# Altium PCB Slave_V2.PcbDoc
Units mil, origin at the board's own origin, x right, y up, seen from the top; angles counter-clockwise.
Board outline 2545 x 2570 mil, 2 copper layers (Top Layer, Bottom Layer); 78 components, 53 nets, 249 pads, 85 vias.
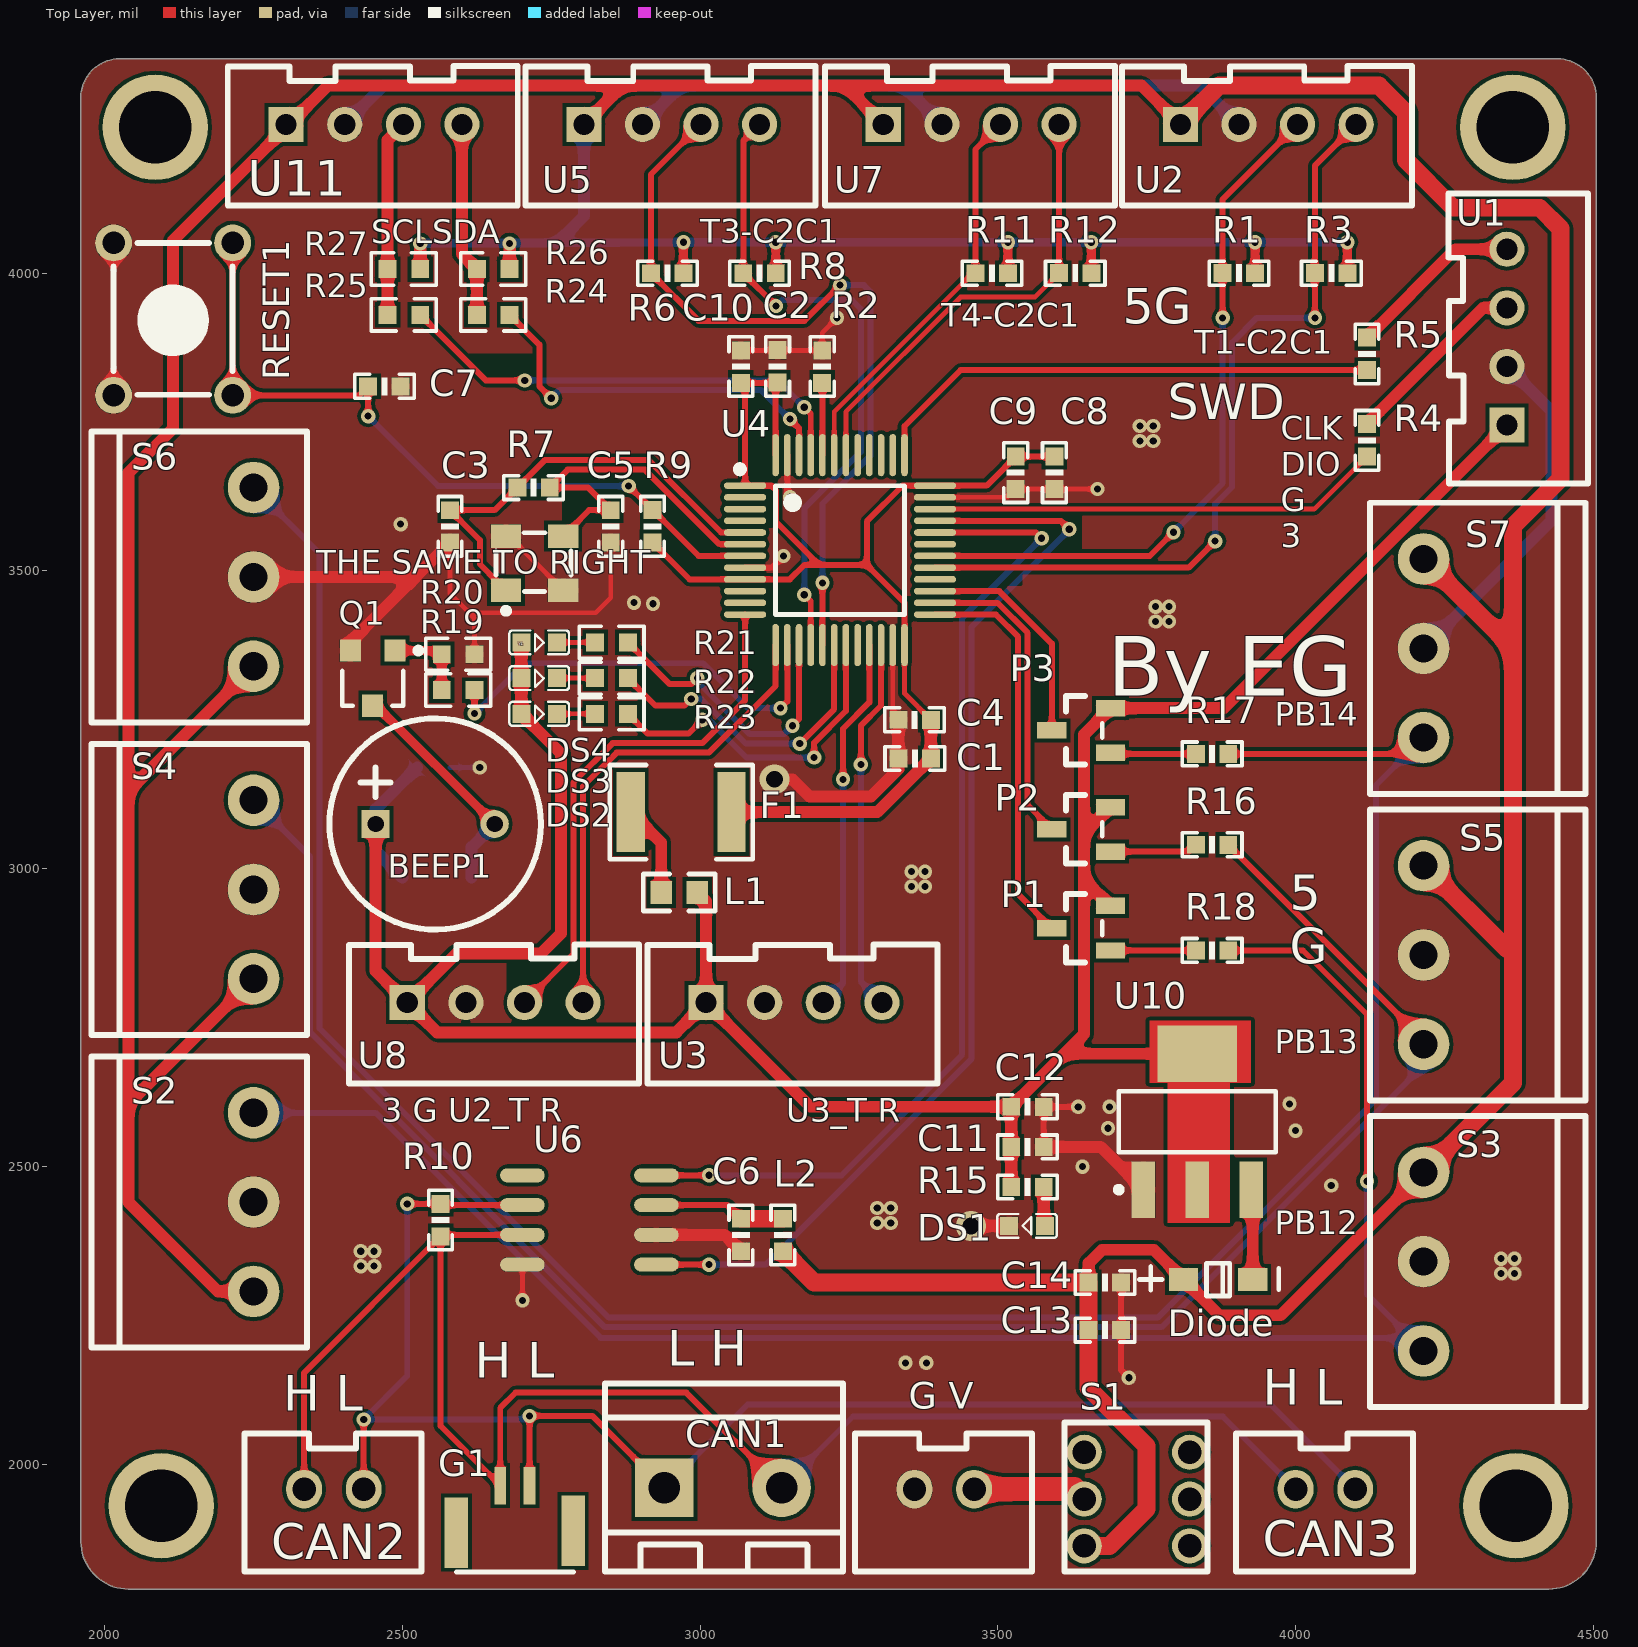
[diagram p0: Top Layer view]
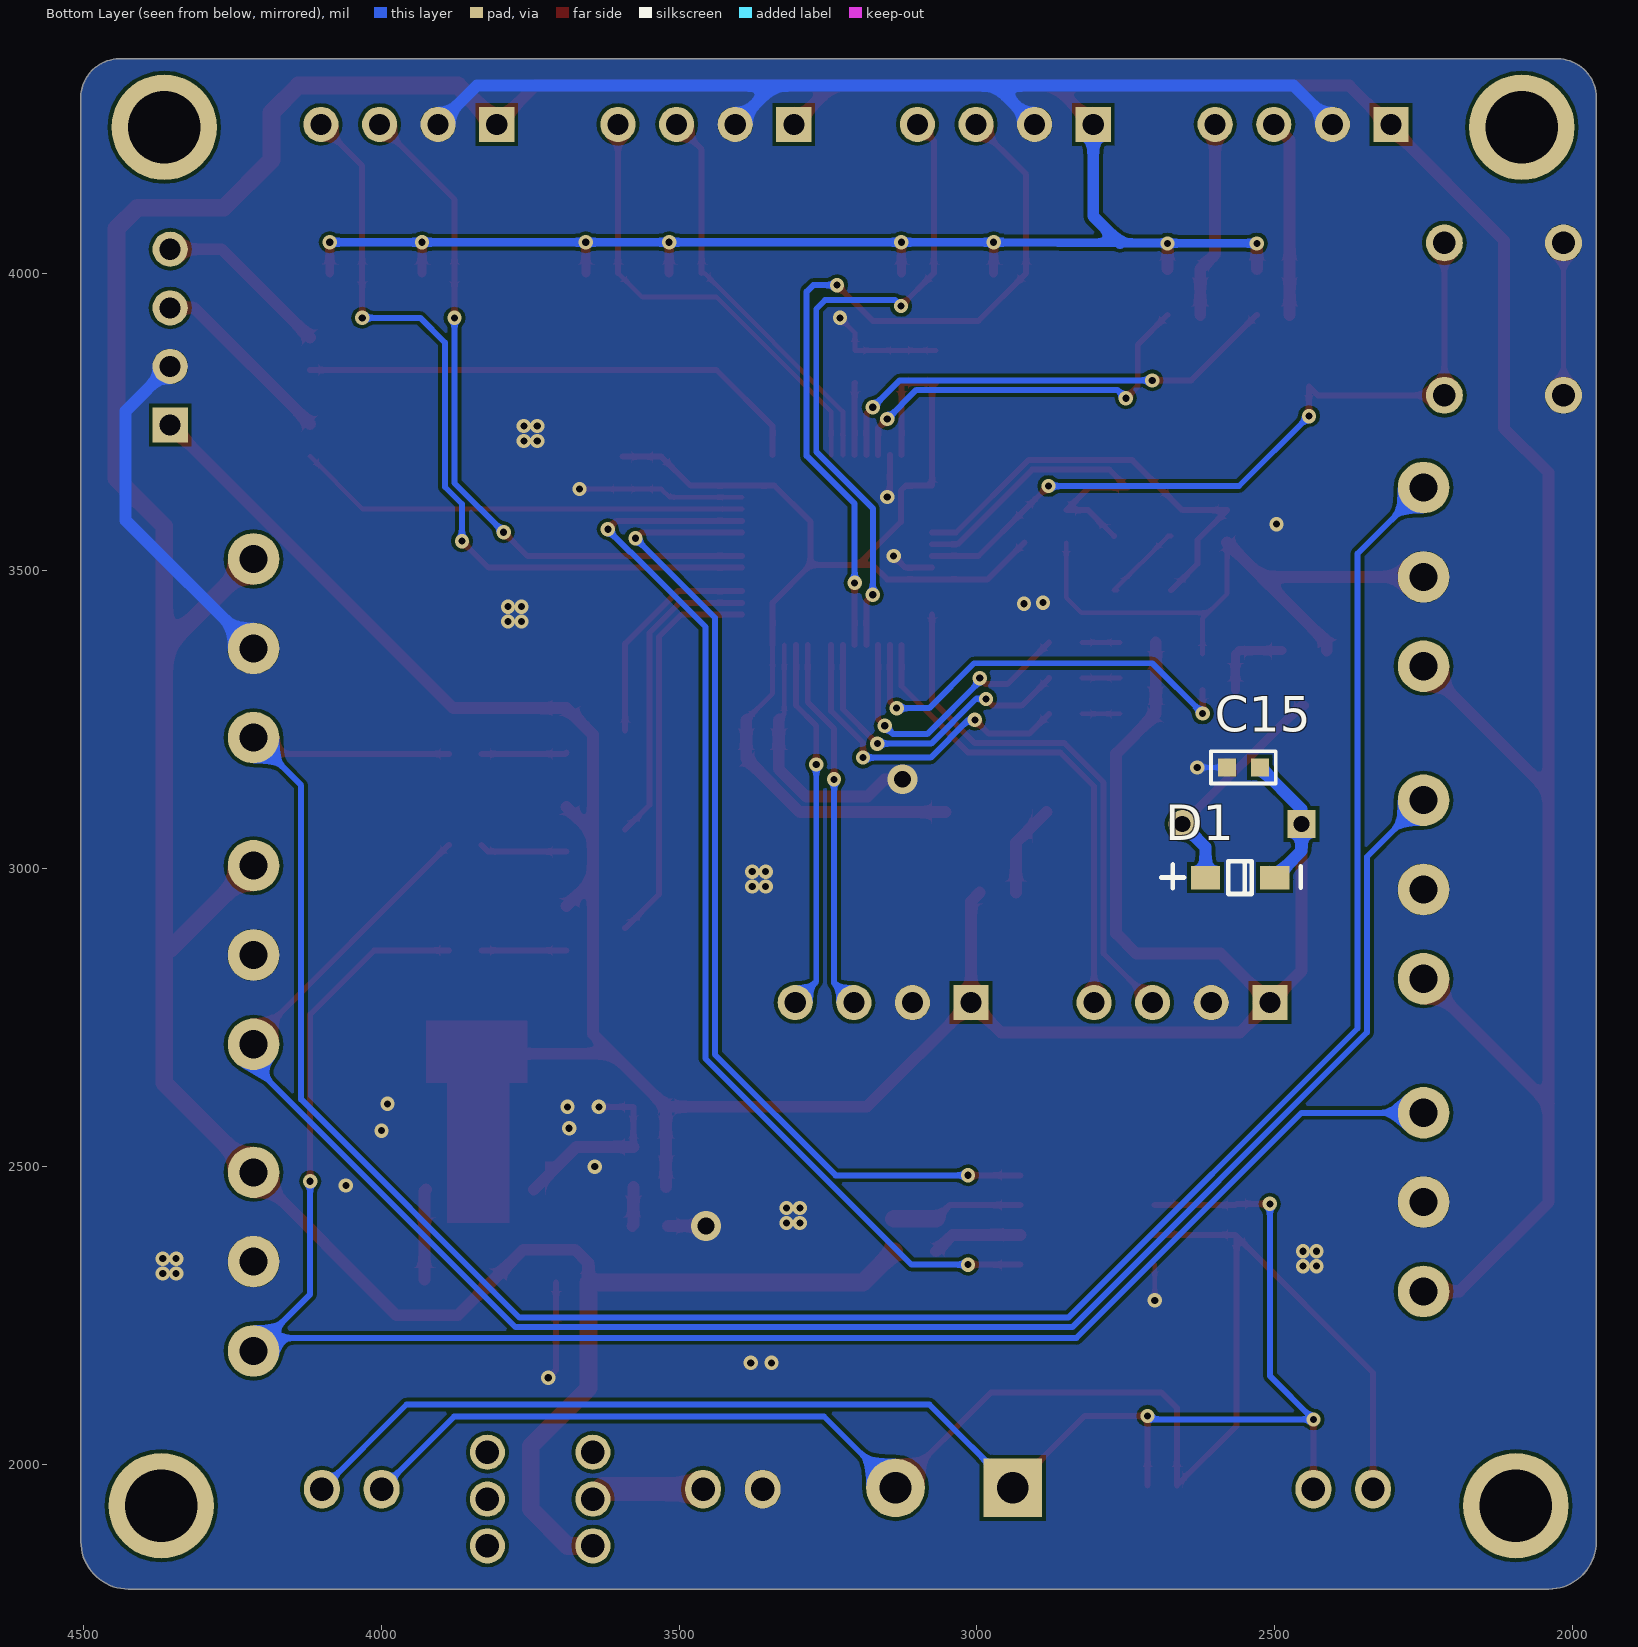
[diagram p1: Bottom Layer view, seen from below]

## Layer stack, top to bottom
Top Solder: solder mask 0.4, Solder Resist, Dk 3.5
Top Layer: signal copper 1.4
Dielectric 1: dielectric 12.6, FR-4, Dk 4.8
Bottom Layer: signal copper 1.4
Bottom Solder: solder mask 0.4, Solder Resist, Dk 3.5

## Board outline
1960,1870 1960,4295 cw(c2025,4295) 2025,4360 4440,4360 cw(c4440,4295) 4505,4295 4505,1870 cw(c4425,1870) 4425,1790 2040,1790 cw(c2040,1870)

## Design rules (kind name [scope] priority, off if disabled: settings)
Clearance [All] p1: gap=6 ignorepadtopadclearanceinfootprint=FALSE
PolygonConnect [IsVia] p1: connectstyle=Direct reliefconductorwidth=10 reliefentries=4 polygonreliefangle="90 Angle" airgapwidth=10
RoutingVias [All] p1: holewidth=28 width=50 viastyle="Through Hole" minholewidth=28 minwidth=50 maxholewidth=28 maxwidth=50
SolderMaskExpansion [All] p1: expansion=4
Width [All] p1: maxlimit=100 minlimit=8 preferedwidth=10
30 further rules are at their usual default settings.

## Classes and differential pairs
net class "New Class": GND

## Components (designator, comment, footprint, x,y, rotation, side; value= is the part's Value field where it differs from the comment)
BEEP1 "BEEP" BELL-5 2455,3075 r0 top locked
C1 "0.1uf" 0603P 3360.5,3185 r180 top
C2 "0.1uf" 0603P 3130,3843.43 r90 top
C3 "22PF" 0603P 2580,3575 r270 top
C4 "0.1uf" 0603P 3360,3250 r0 top
C5 "22" 0603P 2850,3575 r270 top
C6 "104" 0603P 3068.63,2385 r270 top
C7 "0.1uf" 0603P 2470,3809.94 r180 top
C8 "1uf" 0603P 3595.06,3665 r270 top
C9 "0.1uf" 0603P 3530,3665 r270 top
C10 "0.1uf" 0603P 3068.56,3843.43 r270 top
C11 "104" 0603P 3550,2532.65 r180 top
C12 "104" 0603P 3550,2600 r180 top
C13 "106" 0603P 3680,2225 r180 top
C14 "104" 0603P 3680,2305 r180 top
C15 "106" 0603C 2525,3170 r0 bottom
CAN1 "CAN" HEAD2L-0.8 2940,1960 r0 top
CAN2 "CAN" XH2.54-2 2435,1958 r0 top
CAN3 "CAN" XH2.54-2 4100.1,1958 r0 top
D1 "RB161MM-20TR" LC-SOD-123F 2558.15,2985 r0 bottom
Diode "D1" LC-SOD-123F 3870,2310 r180 top
DS1 "LED1" 0603_LED 3550,2400 r180 top
DS2 "LED0" 0603_LED 2728.73,3380 r0 top
DS3 "LED1" 0603_LED 2728.73,3320 r0 top
DS4 "LED2" 0603_LED 2728.73,3260 r0 top
F1 "0.3A 60VPTC FUSE" LC-1812_R 2968.07,3095 r0 top
G1 "CAN-GH1.25" GH1.25_1*2_lishi 2787.57,1818.94 r180 top
"G V" "XH2.54" XH2.54-2 3460.1,1958 r0 top (schematic designator POWER-2.54)
L1 "220R,2.0A,0.05DCR" L_0603 2965,2960 r0 top
L2 "220R,2.0A,0.05DCR" 0603P 3139.1,2385 r270 top
P1 "BSS84-PMOS" LC-SOT-23(SOT-23-3) 3640,2900 r0 top
P2 "BSS84-PMOS" LC-SOT-23(SOT-23-3) 3640,3066.07 r0 top
P3 "BSS84-PMOS" LC-SOT-23(SOT-23-3) 3640,3232.14 r0 top
Q1 "S8050" SOT-23R 2450,3325 r180 top
R1 "3.3K" 0603P 3905,4000.06 r180 top
R2 "10K" 0603P 3205,3843.43 r270 top
R3 "3.3K" 0603P 4060,4000.06 r180 top
R4 "100R" 0603P 4120,3719.45 r90 top
R5 "100R" 0603P 4120,3864.45 r90 top
R6 "3.3K" 0603P 2945,4000 r180 top
R7 "1M" 0603P 2720,3640 r0 top
R8 "3.3K" 0603P 3100,4000 r180 top
R9 "10K" 0603P 2920,3575 r90 top
R10 "120R" 0603P 2564.1,2410 r270 top
R11 "3.3K" 0603P 3490,4000 r180 top
R12 "3.3K" 0603P 3630,4000.06 r180 top
R15 "470R" 0603P 3550,2465.29 r180 top
R16 "10K" 0603P 3860,3040 r180 top
R17 "10K" 0603P 3860,3192.6 r180 top
R18 "10K" 0603P 3860,2862.6 r180 top
R19 "1K" 0603R 2621.1,3300 r180 top
R20 "10K" 0603R 2566.1,3360 r0 top
R21 "470R" 0603R 2823.73,3380 r0 top
R22 "470R" 0603R 2823.73,3320 r0 top
R23 "470R" 0603R 2823.73,3260 r0 top
R24 "0603_100R" 0603R 2680,3930 r180 top
R25 "0603_100R" 0603R 2530,3930 r180 top
R26 "2.7K" 0603R 2625,4007.06 r0 top
R27 "2.7K" 0603R 2475,4007.06 r0 top
RESET1 "KEY_M" KEY_M 2215,4050.91 r270 top
S1 "自锁开关" 自锁开关5.8*5.8 3822.17,2020 r270 top
S2 "3.81" KF2EDG-3.81-3P-弯针 2250,2290 r90 top
S3 "3.81" KF2EDG-3.81-3P-弯针 4215,2490 r270 top
S4 "3.81" KF2EDG-3.81-3P-弯针 2250,2815 r90 top
S5 "3.81" KF2EDG-3.81-3P-弯针 4215,3005 r270 top
S6 "3.81" KF2EDG-3.81-3P-弯针 2250,3340 r90 top
S7 "3.81" KF2EDG-3.81-3P-弯针 4215,3520 r270 top
U1 "HEADER" XH2.54-4 4355,3745 r90 top
U2 "编码器" XH2.54-4 3806.57,4250 r0 top
U3 "串口通信" XH2.54-4 3010,2775 r0 top
U4 "STM32F103C8T6" LQFP-48_7x7x05P 3235,3535 r270 top
U5 "编码器" XH2.54-4 2804.72,4250 r0 top
U6 "TJA1050" SOP8 2814.1,2410 r90 top
U7 "编码器" XH2.54-4 3307.62,4250 r0 top
U8 "串口通信" XH2.54-4 2508.15,2775 r0 top
U10 "AMS1117-3.3" SOT223 3835,2575 r0 top
U11 "IIC" XH2.54-4 2304.72,4250 r0 top
Y1 "8MHZ-无源" "XTAL3225   无源" 2722,3513.08 r0 top

## Footprints (in the part's own frame and the unit in brackets; to place one, negate y for a bottom-side part, rotate by r counter-clockwise, add the part's x,y. Pads: shape width x height; smd on the part's side, far side on the other; paste and mask are expansions set on the pad)
0603_LED [mil]
  rect 30x30 smd: 1(-29,0) 2(31,0)
  silkscreen extent -49,-20 51,20, body extent -40,-25 40,25, height 43
0603C [mil]
  rect 30x30 smd: 1(0,0) 2(55,0)
  silkscreen extent -27,-27 82,27, body extent -4,-16 58,16, height 12
0603P [mil]
  rect 30x30 smd: 1(-27,0) 2(27.5,-0.06)
  silkscreen extent -50,-20 50,20
0603R [mil]
  rect 30x30 smd: 1(0,0) 2(55,0)
  silkscreen extent -27,-27 82,27, body extent -4,-18 58,16, height 18
BELL-5 [mm]
  rect 1.2x1.2 hole 0.7: 1(0,0)
  round 1.2 hole 0.7: 2(5.08,0)
  silkscreen extent -1.97,-4.51 7.05,4.51
GH1.25_1*2_lishi [mm]
  rect 0.5x1.6 smd: 1(1.88,-3.683) 2(3.13,-3.683)
  rect 1x3 smd: ""(0.025,-1.753) ""(5.004,-1.676)
  silkscreen extent 0,0 5,0
HEAD2L-0.8 [mm]
  rect 2.5x2.5 hole 1.35: 1(0,0)
  round 2.5 hole 1.35: 2(5,0)
  silkscreen extent -2.54,-3.56 7.62,4.44
KEY_M [mil]
  round 62 hole 38: 1(0,0) 1(255.91,0) 2(0,-200) 2(255.91,-200)
  silkscreen extent 0,-200 255,0
KF2EDG-3.81-3P-弯针 [mm]
  round 2.2 hole 1.2: 1(0,0) 2(3.81,0) 3(7.62,0)
  silkscreen extent -2.4,-2.29 10.02,6.91
L_0603 [mm]
  rect 0.93x0.98 smd: 1(-0.77,0) 2(0.77,0)
  silkscreen extent -1.53,-0.79 1.54,0.79, body extent -0.85,-0.4 0.85,0.4, height 0.56
LC-1812_R [mm]
  rect 1.2x3.42 smd: 1(-2.15,0) 2(2.15,0)
  silkscreen extent -3.05,-2.01 3.05,2.01, body extent -2.25,-1.6 2.25,1.6, height 0.59
LC-SOD-123F [mm]
  rect 1.25x1 smd: 1(1.475,0) 2(-1.475,0)
  silkscreen extent -2.59,-0.7 3.35,0.7, body extent -1.9,-0.85 1.85,0.85, height 1.2
LC-SOT-23(SOT-23-3) [mm]
  rect 1.25x0.7 smd: 1(1.25,-0.95) 2(-1.25,0) 3(1.25,0.95)
  silkscreen extent -0.65,-1.46 0.9,1.46, body extent -1.5,-1.5 1.5,1.5, height 1.3
LQFP-48_7x7x05P [mm]
  oval 0.28x1.8 smd mask+0.051: 1(-2.75,-4.05) 2(-2.25,-4.05) 3(-1.75,-4.05) 4(-1.25,-4.05) 5(-0.75,-4.05) 6(-0.25,-4.05) 7(0.25,-4.05) 8(0.75,-4.05) 9(1.25,-4.05) 10(1.75,-4.05) 11(2.25,-4.05) 12(2.75,-4.05) 25(2.75,4.05) 26(2.25,4.05) 27(1.75,4.05) 28(1.25,4.05) 29(0.75,4.05) 30(0.25,4.05) 31(-0.25,4.05) 32(-0.75,4.05) 33(-1.25,4.05) 34(-1.75,4.05) 35(-2.25,4.05) 36(-2.75,4.05)
  oval 1.8x0.28 smd mask+0.051: 13(4.05,-2.75) 14(4.05,-2.25) 15(4.05,-1.75) 16(4.05,-1.25) 17(4.05,-0.75) 18(4.05,-0.25) 19(4.05,0.25) 20(4.05,0.75) 21(4.05,1.25) 22(4.05,1.75) 23(4.05,2.25) 24(4.05,2.75) 37(-4.05,2.75) 38(-4.05,2.25) 39(-4.05,1.75) 40(-4.05,1.25) 41(-4.05,0.75) 42(-4.05,0.25) 43(-4.05,-0.25) 44(-4.05,-0.75) 45(-4.05,-1.25) 46(-4.05,-1.75) 47(-4.05,-2.25) 48(-4.05,-2.75)
  silkscreen extent -3.6,-4.42 2.75,2.75, body extent -4.5,-4.5 4.5,4.5, height 1.45
SOP8 [mm]
  round 0.508 on Top Overlay: 0(-3.175,-2.858)
  oval 0.6x1.9 smd: 1(-1.905,-2.858) 2(-0.635,-2.858) 3(0.635,-2.858) 4(1.905,-2.858) 5(1.905,2.858) 6(0.635,2.858) 7(-0.635,2.858) 8(-1.905,2.858)
  body extent -2.49,-1.99 2.49,1.99, height 1.75
SOT223 [mm]
  rect 1x2.4 smd: 1(-2.3,-2.9) 2(0,-2.9) 3(2.3,-2.9)
  rect 3.4x2.4 smd: 4(0,2.9)
  silkscreen extent -3.47,-3.02 3.35,1.3, body extent -3.35,-1.85 3.35,1.85, height 1.8
SOT-23R [mm]
  rect 0.9x0.95 smd: 1(0.95,-1.048) 2(-0.95,-1.048) 3(0,1.302)
  silkscreen extent -2.07,-1.17 1.3,1.3
XH2.54-2 [mil]
  oval 60x65 hole 39.37: 1(0,0) 2(-100.1,0)
  silkscreen extent -200,-138 97,93, body extent -198,-142 98,94, height 276
XH2.54-4 [mm]
  rect 1.5x1.5 hole 0.9: 1(0,0)
  round 1.5 hole 0.9: 2(2.5,0) 3(5,0) 4(7.5,0)
  silkscreen extent -2.49,-3.45 9.88,2.49, body extent -2.47,-3.38 9.93,2.37, height 7
"XTAL3225   无源" [mil]
  rect 51.18x39.37 smd: 1(-48,-45.5) 2(48,-45.5) 3(48,45.5) 4(-48,45.5)
  silkscreen extent -65,-85 61,51
自锁开关5.8*5.8 [mm]
  round 1.5 hole 1: 1(0,-4.5) 2(2,-4.5) 3(4,-4.5) 4(0,0) 5(2,0) 6(4,0)
  silkscreen extent -1.27,-5.33 5.08,0.77

## Part data
C1 C2 C3 C4 C5 C6 C7 C8 C9 C10 C11 C12 C13 C14 C15: library part C
CAN1 CAN2 CAN3: library part HEAD2
D1 Diode: library part 肖特基
DS1 DS2 DS3: library part LED2, "Typical RED, GREEN, YELLOW, AMBER GaAs LED", PackageDocument=Feb-2002, LatestRevisionDate=17-Jul-2002, LatestRevisionNote="Re-released for DXP Platform.", PackageReference=3.2X1.6X1.1, Published=8-Jun-2000, Publisher="Altium Limited"
DS4: "Typical RED, GREEN, YELLOW, AMBER GaAs LED", PackageDocument=Feb-2002, LatestRevisionDate=17-Jul-2002, LatestRevisionNote="Re-released for DXP Platform.", PackageReference=3.2X1.6X1.1, Published=8-Jun-2000, Publisher="Altium Limited"
F1: library part "Fuse 1_2", "Fuse", LatestRevisionDate=17-Jul-2002, LatestRevisionNote="Re-released for DXP Platform.", PackageDescription="Thru-Hole; 2 Leads", PackageReference=PIN-W2/E2.8, Published=8-Jun-2000, Publisher="Altium Limited"
G1: library part GH1.25-CAN
"G V": library part XH2.54-2
L1 L2: library part L
Q1: library part NPN, "8050/BCW846/BCW847"
R1 R3 R6 R8 R11 R12 R16 R17 R18 R26 R27: library part R-0805, "R-0805"
R2 R4 R5 R7 R9 R10 R15 R19 R20 R21 R22 R23: library part R
R24 R25: library part RES
S1: library part Switch_5.8
S2 S3 S4 S5 S6 S7: library part 槽型开关
U1 U3 U8 U11: library part XH2.54插座-4P
U2 U5 U7: library part 编码器4P
U6: library part SN65HVD230D
U10: library part AMS1117
Y1: library part XTAL-3225

## Free pads (board coordinates)
  round 177.17 hole 122.05: 0(2085,4245) 0(2095,1930) 0(4365,4245) 0(4370,1930)

## Via types
v1: diameter 24, hole 12, Top Layer to Bottom Layer, tented both sides, 83 vias
v2: diameter 50, hole 28, Top Layer to Bottom Layer, tented both sides, 2 vias

## Nets (pads, with @x,y where several pads share a name; then routed paths per layer and width w, separated by ;. In a path a pad name is that pad's centre, name@x,y a point inside that pad or via, vN(x,y) a via of type N, cw(c..) or ccw(c..) an arc to the next point about the centre after c; other vN are vias at no path point)
1: P1.2 U4.25 | length 667.9
  Top Layer w10: U4.25 3496.6,3426.73 3534,3389.33 3534,2956.79 P1.2
2: P2.2 U4.26 | length 523.2
  Top Layer w10: U4.26 3499.54,3446.42 3550,3395.96 3550,3106.86 P2.2
3: P3.2 U4.27 | length 378.6
  Top Layer w10: U4.27 3502.48,3466.1 3590.79,3377.8 P3.2
3V3: BEEP1.1 C11.2 C12.2 C15.1 D1.2 DS2.1 DS3.1 DS4.1 L1.2 P1.3 P2.3 P3.3 R15.2 U1.1 U3.1 U8.1 U10.2 U10.4 | length 4781.1
  Top Layer w20: BEEP1.1 2455,2828.15 U8.1 ; DS2.1 DS3.1 DS4.1 2766.43,3193.31 2766.43,2891.43 2732.43,2857.43 2590.57,2857.43 U8.1 ; L1.2 3010,2945.32 U3.1 ; R15.2 C11.2 C12.2 ; P1.3 3645,2981.61 ; P2.3 3645,3059.26 ; U10.4 3611.61,2689.17 ; U1.1 3879.54,3269.54 P3.3 3645,3225.33 3645,3059.26 ; U8.1 2558.15,2725 2960,2725 U3.1 ; U3.1 3184.94,2600.06 C12.2 ; C12.2 3611.61,2689.17 ; 3611.61,2689.17 3645,2722.56 3645,2981.61 ; 3645,2981.61 3645,3059.26
  Bottom Layer w20: D1.2 2455,3030.08 BEEP1.1 2455,3100 C15.1
3V3_MCU: C1.1 C2.1 C4.2 C8.1 C9.1 C10.2 F1.2 R9.1 U4.1 U4.9 U4.24 U4.36 U4.48 | length 2141.3
  Top Layer w8: U4.24 3343.27,3294.17 C4.2
  Top Layer w10: R9.1 2982.21,3485.79 U4.9 3150.79,3485.79 3175,3510 3200,3510 ; U4.48 3126.73,3813.16 C2.1@3129.5,3815.93 ; C2.1 C2.1@3129.5,3815.93 ; U4.24 3343.27,3446.73 3280,3510 ; C8.1 C9.1 3481.27,3643.27 U4.36 3340,3643.27 3280,3583.27 3280,3510 ; C2.1@3129.5,3815.93 C10.2 3075.55,3808.87 U4.1 3119.61,3643.27 3127.79,3635.09 3127.79,3582.21 3200,3510 ; 3200,3510 3280,3510
  Top Layer w20: F1.2 3297.5,3095 C1.1 C4.2
5V: C13.2 C14.2 Diode.1 L2.2 R1.1 R3.1 R6.1 R8.1 R11.1 R12.1 R26.2 R27.2 S1.3 S2.1 S3.1 S4.1 S5.1 S6.1 S7.1 U2.1 U5.1 U7.1 U11.1 | length 11445.1
  Top Layer w15: R6.1 v1(2972,4052) ; R8.1 v1(3127,4052) ; R11.1 v1(3517,4052) ; R12.1 v1(3657,4052.06) ; R1.1 v1(3932,4052.06) ; R3.1 v1(4087,4052.06)
  Top Layer w20: S2.1 2190,2290 2040,2440 2040,2605 ; S4.1 2040,2605 ; S6.1 2040,3130 ; R27.2 v1(2530,4050) ; R26.2 v1(2680,4050) ; U5.1 2869.72,4315 ; U7.1 3242.62,4315 ; C14.2 3652.5,2337.5 3675,2360 3761.93,2360 Diode.1 3871.93,2250 3975,2250 S3.1 ; U2.1 3741.57,4315 3242.62,4315 ; 2040,2605 2040,3130 ; 2040,3130 2040,3665 2115,3740 2115,4055.28 2304.72,4245 U11.1 2309.72,4250 2374.72,4315 2869.72,4315 ; 2869.72,4315 3242.62,4315
  Top Layer w30: L2.2 3191.47,2305.06 C14.2 C13.2 3652.5,2127.5 3749.54,2030.46 3749.54,1924.54 3687.52,1862.52 S1.3 ; U2.1 3871.57,4315 4140,4315 4185,4270 4185,4190 4265,4110 4410,4110 4445,4075 4445,3655 4365,3575 4365,3370 ; S3.1 4365,2640 4365,2865 ; S5.1 4355,2865 4365,2865 ; S7.1 4365,3370 ; 4365,2865 4365,3370
  Bottom Layer w15: v1(2530,4050) 2680,4050.68 2760,4051.04 v1(2972,4052) v1(3127,4052) v1(3517,4052) 4086.94,4052 v1(4087,4052.06)
  Bottom Layer w20: 2760,4051.04 2804.72,4095.77 U5.1
BEEP: R19.1 U4.14 | length 730.4
  Top Layer w10: v1(2621.1,3260.52) R19.1 ; v1(3135,3269.54) 3146.42,3280.96 U4.14
  Bottom Layer w10: v1(2621.1,3260.52) 2705.58,3345 3005,3345 3080.46,3269.54 v1(3135,3269.54)
CAN1_H: CAN1.2 CAN2.2 CAN3.2 G1.2 R10.2 U6.7 | length 2761.3
  Top Layer w10: CAN2.2 2334.9,2153.36 R10.2 ; U6.7 2566.54,2385 R10.2 ; CAN1.2 2976.85,2120 2690,2120 2664.36,2094.36 G1.2 2564.04,2064.26 R10.2
  Bottom Layer w10: CAN1.2 3256.85,2080 3878,2080 CAN3.2
CAN1_L: CAN1.1 CAN2.1 CAN3.1 G1.1 R10.1 U6.6 | length 2655
  Top Layer w10: CAN2.1 v1(2435,2075) ; v1(2508.15,2437) R10.1 2566.1,2435 U6.6 ; G1.1 v1(2713.57,2080.94) 2819.06,2080.94 CAN1.1
  Bottom Layer w10: v1(2508.15,2437) 2508.15,2148.15 v1(2435,2075) 2707.64,2075 v1(2713.57,2080.94) ; CAN1.1 3080,2100 3958.1,2100 CAN3.1
"CAN RX": U4.32 U6.4 | length 1703.1
  Top Layer w10: U6.4 v1(3015,2485) ; U4.32 3564.06,3564.53 v1(3573.58,3555)
  Bottom Layer w10: v1(3015,2485) 3237.37,2485 3440,2687.63 3440,3421.42 v1(3573.58,3555)
"CAN TX": U4.33 U6.1 | length 1861.7
  Top Layer w10: U6.1 v1(3015,2335) ; U4.33 3605.79,3584.21 v1(3620,3570)
  Bottom Layer w10: v1(3015,2335) 3110,2335 3456,2681 3456,3406 3582,3532 3583.11,3532 3620,3568.89 v1(3620,3570)
GND: "G V.2" C1.2 C2.2 C3.2 C4.1 C5.2 C6.2 C7.1 C8.2 C9.2 C10.1 C11.1 C12.1 C13.1 C14.1 C15.2 DS1.2 Q1.1 R2.1 R20.2 RESET1.2 S2.2 S3.2 S4.2 S5.2 S6.2 S7.2 U1.2 U2.2 U3.2 U4.8 U4.23 U4.35 U4.47 U5.2 U6.2 U6.8 U7.2 U8.2 U10.1 U11.2 Y1.2 Y1.4 | length 5687.8
  Top Layer w8: RESET1.2@2015,3795 RESET1.2@2015,4050.91 ; C3.2 2579.94,3461.64 2611.89,3429.69 ; R20.2 2621.1,3420.47 2611.89,3429.69 ; Y1.4 2679,3558.58 Y1.2 Y1.2@2765,3467.58 ; v1(2701.58,2275) U6.8 ; C5.2 2849.94,3454.94 2824.69,3429.69 2611.89,3429.69 ; C10.1 R2.1 3205,3900 v1(3230,3925) ; U4.23 3323.58,3259.42 C4.1 ; U4.35 3516.02,3623.58 C9.2 C8.2 v1(3667.5,3637.5)
  Top Layer w10: U4.8 3120.31,3505.47 v1(3140,3525.16) ; U4.47 3146.42,3628.58 v1(3150.79,3624.21) ; C11.1 C12.1 v1(3635,2600) ; C14.1 C13.1 3707,2158 v1(3720,2145)
  Top Layer w20: S6.2 2522.44,3490 ; Q1.1 2412.6,3380.16 2522.44,3490 ; C3.2 2522.44,3490 ; U6.2 3041.06,2385 C6.2 ; v2(3125,3150) 3155,3150 3184,3121 3286.73,3121 3333,3167.27 C1.2 C4.1 ; v2(3455,2400) DS1.2 ; C11.1 3672.63,2532.65 U10.1
  Bottom Layer w8: C15.2 v1(2630,3170)
  Bottom Layer w20: U11.2 2468.15,4315 2968.15,4315 ; U5.2 2968.15,4315 ; U7.2 3341.05,4315 ; U2.2 3840,4315 3341.05,4315 ; S7.2 4430,3585 4430,3768.43 U1.2 ; 2968.15,4315 3341.05,4315
  other v1: 3345,2170 3380,2170 4345,2320 4367.56,2320 2430,2332.5 2452.56,2332.5 4345,2345 4367.56,2345 2430,2357.5 2452.56,2357.5 3297.5,2405 3320.06,2405 3297.5,2430 3320.06,2430 4060,2467.98 3642.02,2499.5 4000,2560 3685,2564.03 3687.58,2600 3990,2605 3355,2970 3377.56,2970 3355,2995 3377.56,2995 3765,3415 3787.56,3415 3765,3440 3787.56,3440 2921.01,3445 2889.1,3446.73 2497,3578.62 3738.47,3718.27 3761.04,3718.27 3738.47,3743.27 3761.04,3743.27
IN1: R18.1 S2.3 S3.3 | length 2981.5
  Top Layer w10: R18.1 4012.4,2862.6 4120,2755 v1(4120,2475)
  Bottom Layer w10: S2.3 2455,2590 2833,2212 S3.3@4193,2212 ; v1(4120,2475) 4120,2285 S3.3@4193,2212 ; S3.3 S3.3@4193,2212
IN2: R16.1 S4.3 S5.3 | length 3192.5
  Top Layer w10: R16.1 4215,2712 S5.3
  Bottom Layer w10: S4.3 2345,3020 2345,2725 2840,2230 3775,2230 4215,2670 S5.3
IN3: R17.1 S6.3 S7.3 | length 4061.2
  Top Layer w10: R17.1 4187.6,3192.6 S7.3
  Bottom Layer w10: S6.3 2361,3529 2361,2731.63 2846.63,2246 3768.37,2246 4135,2612.63 4135,3140 S7.3
LED0: R21.2 U4.15 | length 497.6
  Top Layer w10: R21.2 2948.73,3310 2985.32,3310 v1(2995.32,3320) ; v1(3155,3240) 3166.1,3251.1 U4.15
  Bottom Layer w10: v1(2995.32,3320) 2995.32,3314.31 3083.63,3226 3141,3226 v1(3155,3240)
LED1: R22.2 U4.18 | length 533
  Top Layer w10: R22.2 2924.99,3273.74 2973.74,3273.74 v1(2985,3285) ; v1(3167.37,3210) 3225.16,3267.78 U4.18
  Bottom Layer w10: v1(2985,3285) 3002,3285 3077,3210 v1(3167.37,3210)
LED2: R23.2 U4.19 | length 573.5
  Top Layer w10: R23.2 2911.99,3226.74 2980.4,3226.74 v1(3003.6,3249.94) ; v1(3191.47,3186.54) 3191.47,3211.47 3244.84,3264.84 U4.19
  Bottom Layer w10: v1(3003.6,3249.94) 3014.44,3249.94 3077.84,3186.54 v1(3191.47,3186.54)
NetBEEP1_2: BEEP1.2 D1.1 Q1.3 | length 393.4
  Top Layer w15: Q1.3 2456.26,3273.74 BEEP1.2
  Bottom Layer w20: D1.1 2616.22,3036.22 BEEP1.2
NetC3_1: C3.1 R7.1 U4.5 Y1.1 | length 754
  Top Layer w10: Y1.1 2630,3511.58 2630,3552 C3.1 2655,3602 R7.1 2739,3686 2913.88,3686 3035.35,3564.53 U4.5
NetC5_1: C5.1 R7.2 U4.6 Y1.3 | length 608.5
  Top Layer w10: Y1.3 2813.42,3602 C5.1 2812.06,3639.94 R7.2 2777.56,3670 2907.25,3670 3032.41,3544.84 U4.6
NetC6_1: C6.1 L2.1 U6.3 | length 222
  Top Layer w10: U6.3 3045.63,2435 C6.1
  Top Layer w30: C6.1 L2.1
NetC7_2: C7.2 R9.2 RESET1.1 U4.7 | length 1269.9
  Top Layer w10: RESET1.1@2215,4050.91 2215,3795 2427.5,3795 C7.2 v1(2442.5,3760) ; v1(2880,3642.56) R9.2 2997.41,3525.16 U4.7
  Bottom Layer w10: v1(2442.5,3760) 2559.94,3642.56 v1(2880,3642.56)
NetDiode_2: Diode.2 U10.3 | length 151.9
  Top Layer w20: U10.3 3928.07,2458.31 Diode.2
NetDS1_1: DS1.1 R15.1 | length 66.1
  Top Layer w20: R15.1 3577,2402 DS1.1
NetDS2_2: DS2.2 R21.1 | length 64
  Top Layer w8: DS2.2 R21.1
NetDS3_2: DS3.2 R22.1 | length 64
  Top Layer w8: DS3.2 R22.1
NetDS4_2: DS4.2 R23.1 | length 64
  Top Layer w8: DS4.2 R23.1
NetF1_1: F1.1 L1.1 | length 156.2
  Top Layer w20: F1.1 2934.69,3043.74 L1.1
NetP1_1: P1.1 R18.2 | length 143.3
  Top Layer w10: P1.1 3832.44,2862.6 R18.2
NetP2_1: P2.1 R16.2 | length 148
  Top Layer w10: P2.1 3821.11,3028.67 R16.2
NetP3_1: P3.1 R17.2 | length 144.1
  Top Layer w10: P3.1 3691.29,3192.66 R17.2
NetPOWER-2.54_1: "G V.1" S1.2 | length 191.8
  Top Layer w40: 3460.1,1958 3628.26,1958 S1.2
NetQ1_2: Q1.2 R19.2 R20.1 | length 141.3
  Top Layer w15: Q1.2 2559.84,3366.26 R20.1 R19.2
NetR2_2: R2.2 U4.44 | length 121.7
  Top Layer w10: R2.2 3205.47,3815.39 U4.44
NetR4_2: R4.2 U1.3 | length 315.7
  Top Layer w20: R4.2 4314.97,3941.85 U1.3
NetR5_2: R5.2 U1.4 | length 296.4
  Top Layer w20: R5.2 4268.39,4040.28 U1.4
NetR24_1: R24.1 U4.46 | length 662.8
  Top Layer w10: R24.1 2730,3880 2730,3810 v1(2750,3790) ; v1(3150.79,3755) 3166.1,3739.68 U4.46
  Bottom Layer w10: v1(2750,3790) 2764,3804 3101.79,3804 v1(3150.79,3755)
NetR25_1: R25.1 U4.45 | length 794.2
  Top Layer w10: R25.1 2640,3820 v1(2705.58,3820) ; v1(3175,3775) 3185.79,3764.21 U4.45
  Bottom Layer w10: v1(2705.58,3820) 3130,3820 v1(3175,3775)
SCL: R25.2 R27.1 U11.3 | length 331
  Top Layer w20: R25.2 R27.1 2475,4223.43 U11.3
SDA: R24.2 R26.1 U11.4 | length 330.4
  Top Layer w20: U11.4 2600,4032.06 R26.1 R24.2
SWCLK: R5.1 U4.37 | length 864.6
  Top Layer w10: U4.37 3343.27,3743.27 3437.45,3837.45 R5.1
SWDIO: R4.1 U4.34 | length 762.2
  Top Layer w8: U4.34 4031.45,3603.9 R4.1
TIM1_CH1: R3.2 U2.4 U4.29 | length 1344.2
  Top Layer w10: U4.29 3820.47,3505.47 v1(3865,3550) ; v1(4032.5,3925) R3.2 4032.5,4180.65 U2.4
  Bottom Layer w10: v1(3865,3550) 3865,3612.37 3893.5,3640.87 3893.5,3883.5 3935,3925 v1(4032.5,3925)
TIM1_CH2: R1.2 U2.3 U4.30 | length 1188.4
  Top Layer w10: U4.30 3755.16,3525.16 v1(3795,3565) ; v1(3877.5,3925) R1.2 3877.5,4124.07 U2.3
  Bottom Layer w10: v1(3795,3565) 3877.5,3647.5 v1(3877.5,3925)
TIM3_CH1: R8.2 U4.16 U5.4 | length 1100.3
  Top Layer w10: U5.4 3072.5,4222.5 R8.2 v1(3127.56,3945) ; v1(3175,3460) 3185.79,3449.21 U4.16
  Bottom Layer w10: v1(3127.56,3945) 3137.56,3955 3255,3955 3270,3940 3270,3700 3175,3605 v1(3175,3460)
TIM3_CH2: R6.2 U4.17 U5.3 | length 1342.6
  Top Layer w10: U5.3 2917.5,4165.93 R6.2 2997.56,3920 3175,3920 v1(3235,3980) ; U4.17 v1(3205.47,3480)
  Bottom Layer w10: v1(3205.47,3480) 3205.47,3612.85 3286,3693.37 3286,3969 3275,3980 v1(3235,3980)
TIM4_CH1: R12.2 U4.42 U7.4 | length 777.1
  Top Layer w8: U4.42 3244.84,3767.54 3437.3,3960 3562.37,3960 R12.2
  Top Layer w10: R12.2 3602.9,4000.53 U7.4
TIM4_CH2: R11.2 U4.43 U7.3 | length 674.1
  Top Layer w8: U4.43 3225.16,3767.66 3457.56,4000.06 R11.2
  Top Layer w10: R11.2 3462.5,4208.02 U7.3
U2_RX: U4.13 U8.4 | length 825.3
  Top Layer w10: U8.4 2803.43,3138.43 2859.74,3194.74 3014.74,3194.74 3126.73,3306.73 U4.13
U2_TX: U4.12 U8.3 | length 893.4
  Top Layer w10: U8.3 2787.43,2857.43 2787.43,3145.05 2853.11,3210.74 3003.6,3210.74 3075.55,3282.69 U4.12
U3_RX: U3.4 U4.22 | length 629.2
  Top Layer w10: v1(3270,3175) 3270,3240 3303.9,3273.9 U4.22
  Bottom Layer w10: v1(3270,3175) 3270,2810.28 U3.4
U3_TX: U3.3 U4.21 | length 632.6
  Top Layer w10: v1(3240,3150) 3240,3235 3284.21,3279.21 U4.21
  Bottom Layer w10: U3.3 3240,2808.15 v1(3240,3150)
pads on no net: G1. S1.1 S1.4 S1.5 S1.6 U4.2 U4.3 U4.4 U4.10 U4.11 U4.20 U4.28 U4.31 U4.38 U4.39 U4.40 U4.41 U6.0 U6.5

## Polygon pours and split planes (outlines as drawn)
GND on Top Layer "Top Layer-No Net" (solid, remove dead copper, pour order 15): 1960,1870 1960,4295 cw(c2025,4295) 2025,4360 4440,4360 cw(c4440,4295) 4505,4295 4505,1870 cw(c4425,1870) 4425,1790 2040,1790 cw(c2040,1870)
GND on Bottom Layer "Top Layer-No Net1" (solid, remove dead copper, pour order 16): 1960,1870 1960,4295 cw(c2025,4295) 2025,4360 4440,4360 cw(c4440,4295) 4505,4295 4505,1870 cw(c4425,1870) 4425,1790 2040,1790 cw(c2040,1870)

## Other copper
Top Layer:
  rectangle net 3V3: 3755,2640 3925,2745
  rectangle net 3V3: 3785,2405 3890,2745
  pour cut-out: 2610,3865.93 2610.93,3865 2718.78,3865 2718.78,3831.65 2718.35,3831.22 2644.65,3831.22
  pour cut-out: 2673.97,2792.92 2674.76,2793.71 2674.76,2873.74 2778.74,2873.74 2775,2870 2775,2790.13 2676.75,2790.13
  pour cut-out: 2776.21,2871.61
  pour cut-out: 3588.05,3573 3588.05,3569.51 3582.37,3563.84 3582.37,3537.02 3638.79,3537.02 3640.81,3535 3640.81,3591.5 3643.02,3593.7 3595,3593.7
  pour cut-out: 3541.09,3476.46 3541.09,3496.02 3435.26,3496.02 3435,3496.27 3433.16,3494.43 3433.16,3475 3539.63,3475
  pour cut-out: 2899.06,3581.5 2900.09,3582.53 2932.89,3582.53 2932.89,3566.91 2934.69,3565.12 2934.57,3565 2899.39,3565 2899.39,3581.17
  pour cut-out: 2871,3581
  pour cut-out: 2768.5,3584.21 2771.71,3581 2829,3581 2829,3624.68 2821.63,3632.05 2768.5,3632.05
  pour cut-out: 2721.5,3650.98 2724.88,3647.59 2721.76,3650.72
  pour cut-out: 2714,3619 2726.44,3619 2726.5,3618.94 2726.5,3647.59 2724.88,3647.59 2718.63,3653.85 2713.96,3653.85 2713.96,3643.77 2714,3643.72
  pour cut-out: 2673.1,3851.22 2676.43,3854.55 2676.43,3862.53 2639.11,3862.53 2638.64,3862.99 2635,3859.35 2635,3851.69
  pour cut-out: 2798.73,3330

## Silkscreen, mask and mechanical layers (free items; w line width, h text height)
Top Overlay:
  text "T3-C2C1" at 3000,4050.91 h40
  text "SCLSDA" at 2448,4050 h40
  text "5G" at 3710,3915 h60
  text "T4-C2C1" at 3405,3910 h40
  text "T1-C2C1" at 3830,3865 h40
  text "SWD" at 3785,3755 h60
  text "CLK / DIO / G / 3" at 3975,3540 h40
  text "THE SAME TO RIGHT" at 2355,3495 h40
  text "By EG" at 3685,3290 h100
  text "PB14" at 3965,3240 h40
  text "5 / G" at 3990,2840 h60
  text "PB13" at 3965,2690 h40
  text "3 G U2_T R" at 2465,2575 h40
  text "U3_T R" at 3145,2575 h40
  text "PB12" at 3965,2385.87 h40
  text "L H" at 2945,2165 h60
  text "H L" at 2621.1,2145 h60
  text "H L" at 3945,2100 h60
  text "H L" at 2300,2090 h60
Mechanical 1:
  the board outline again, w10